# EAGLE board Rear_brake_lamp_v4 (EAGLE 7.3.0)
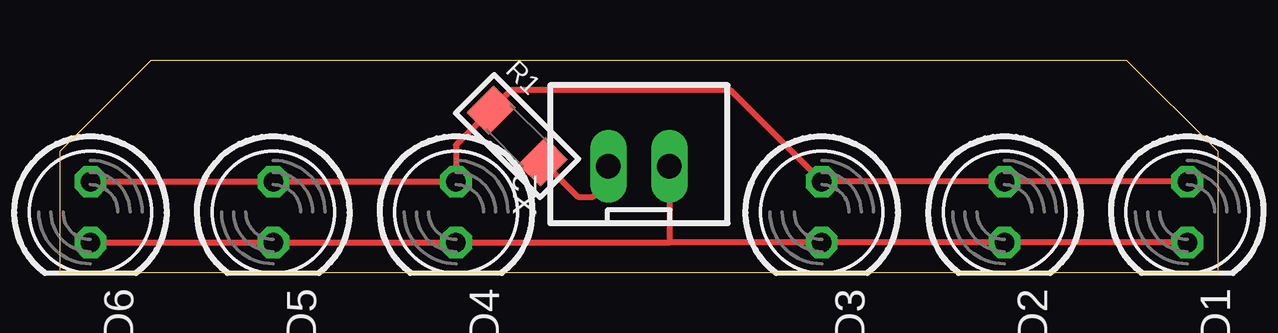
[diagram p0: board, top side]

Size 48.26 x 8.89 mm. Coordinates in mm from the lower left corner, seen from the top.
Outline: 0,0 0,5.08 3.81,8.89 44.45,8.89 48.26,5.08 48.26,0 0,0
Copper layers (1*16): Top 0.035mm / dielectric 1.5mm / Bottom 0.035mm
Design rules "default": minimum track width 10mil, minimum drill 24mil, track to track 8mil, track to pad 8mil, pad to pad 8mil, via to via 8mil, smd to smd 8mil, copper to edge 40mil, drill to drill 8mil, minimum pad ring 10mil, minimum via ring 8mil, stop-mask expansion 4mil, vias tented up to drill 0mil, thermal gap 10mil

## Footprints (pad centres in the part's own frame; a part is rotated, then mirrored left to right if it is on the bottom)
LED5MM = drill 0.813 octagon: A -1.27,0; K 1.27,0
R1206 = smd 1.3 x 1.6: 1 -1.524,0; 2 1.524,0
JST-XH-02-PACKAGE-LONG-PAD = drill 1.016 long: 1 -1.27,0; 2 1.27,0

## Placement (x,y rotation side)
LED1  Red  [LED5MM]  46.99,2.54 270 top
LED2  Red  [LED5MM]  39.37,2.54 270 top
LED3  Red  [LED5MM]  31.75,2.54 270 top
LED4  Red  [LED5MM]  16.51,2.54 270 top
LED5  Red  [LED5MM]  8.89,2.54 270 top
LED6  Red  [LED5MM]  1.27,2.54 270 top
R1  150  [R1206]  19.05,5.71 315 top
X2  JST-XH-02-PIN-LONG-PAD  [JST-XH-02-PACKAGE-LONG-PAD]  24.13,4.45 0 top

## Library data of the parts
LED1-LED6 = led; COLOR: Red; CURRENT_EMPIRICAL: 1.48 mA; MANUFACTURER: LUCKYLIGHT; MANUFACTURER_PART_NUMBER: LL-503VD2E-1B; SUPPLIER: TME; SUPPLIER_PART_NUMBER: LL-503VD2E-1B; SUPPLIER_URL: https://www.tme.eu/pl/details/ll-503vd2e-1b/diody-led-tht-okragle/luckylight/; VOLTAGE_EMPIRICAL: 1.83 V
R1 = rc-master-smd; MANUFACTURER: ROYAL OHM; MANUFACTURER_PART_NUMBER: 1206S4J0151T5E; RESISTANCE: 150 Ohm; SUPPLIER: TME; SUPPLIER_PART_NUMBER: 1206S4J0151T5E; SUPPLIER_URL: https://www.tme.eu/pl/details/1206s4j0151t5e/rezystory-smd/royal-ohm/
X2 = Rembrandt Electronics - JST XH Connectors v1-0

## Nets
API_BRAKE: LED1.A LED2.A LED3.A LED4.A LED5.A LED6.A R1.1
GND: LED1.K LED2.K LED3.K LED4.K LED5.K LED6.K X2.2
N$1: R1.2 X2.1

## Tracks (layer width: path | path; a pad name or v marks a point on that pad's centre or on a via)
API_BRAKE
  Top 0.254: LED1.A LED2.A LED3.A 27.94,7.62 18.8,7.62 R1.1 16.51,5.33 LED4.A LED5.A LED6.A
GND
  Top 0.254: X2.2 25.4,1.27 | LED6.K LED5.K LED4.K 25.4,1.27 | 25.4,1.27 LED3.K LED2.K LED1.K
N$1
  Top 0.254: X2.1 22.86,3.81 22.23,3.17 21.59,3.17 R1.2